# EAGLE board electretMicPreamp - THT (EAGLE 8.7.0)
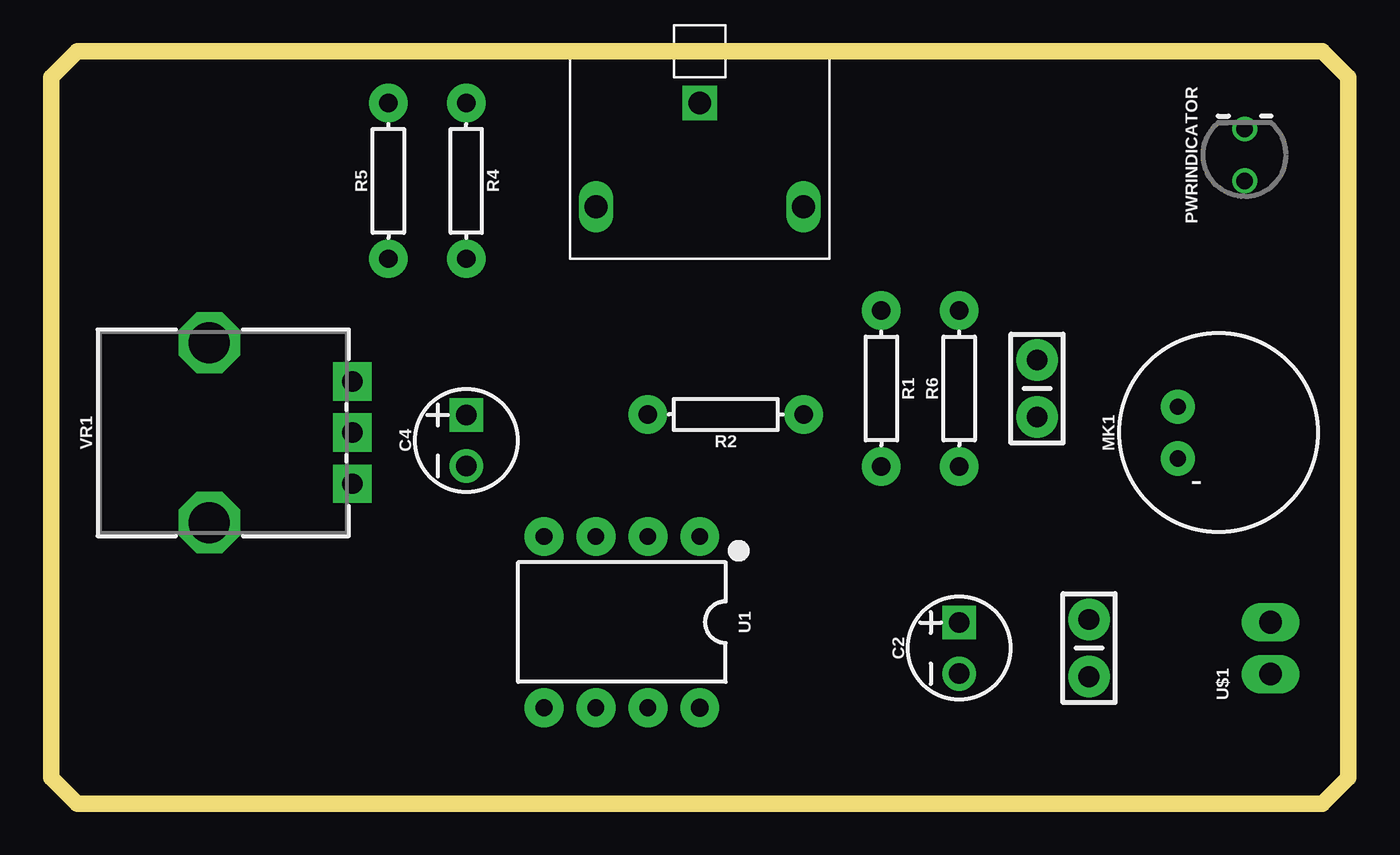
[diagram p0: board, top side]
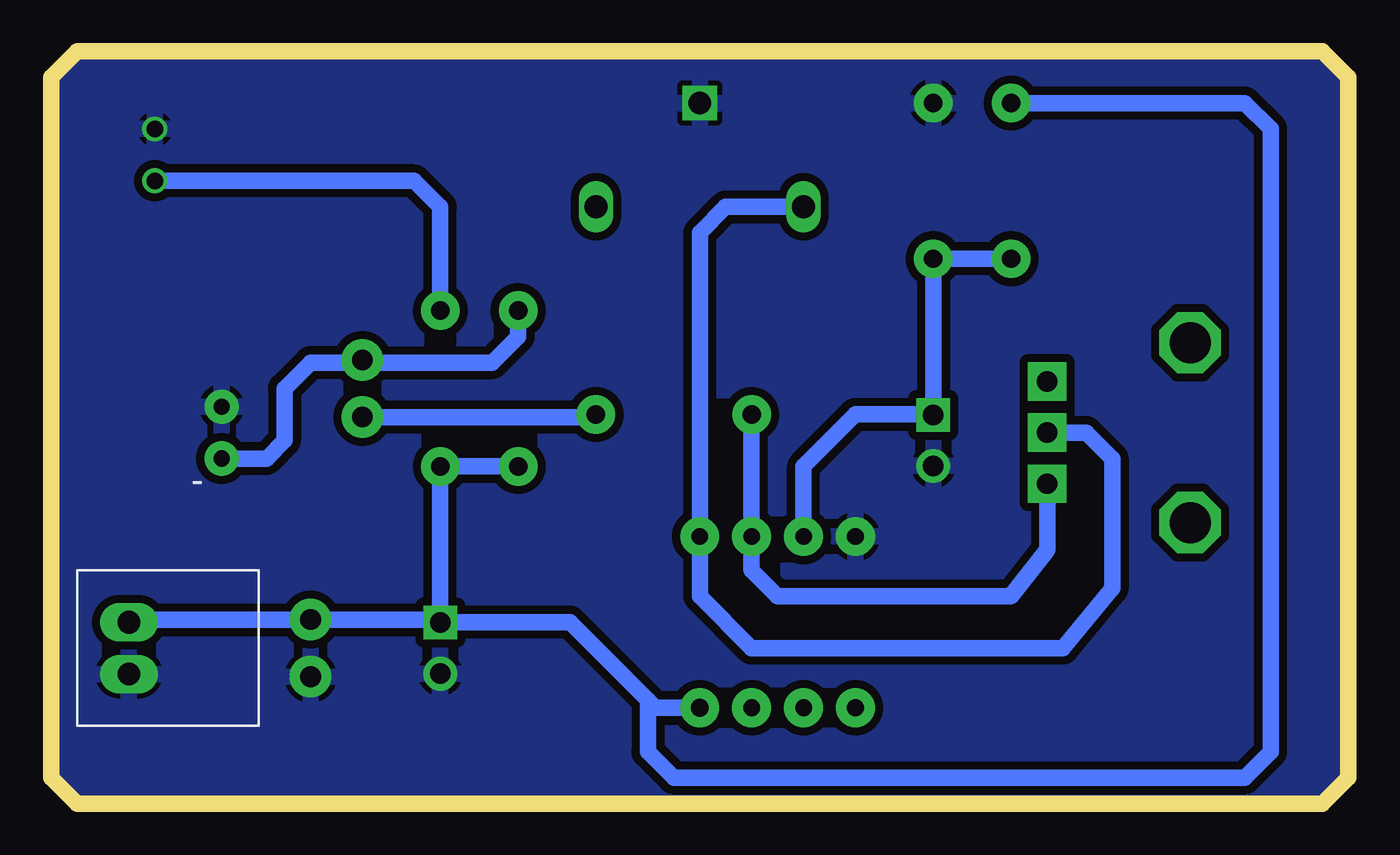
[diagram p1: board, bottom side, seen from below]

Size 63.5 x 36.83 mm. Coordinates in mm from the lower left corner, seen from the top.
Outline: 0,35.56 0,1.27 1.27,0 62.23,0 63.5,1.27 63.5,35.56 62.23,36.83 1.27,36.83 0,35.56
Copper layers (1*16): Top 0.035mm / dielectric 1.5mm / Bottom 0.035mm
Design rules "OthermillDRC_1_64_v2": minimum track width 16mil, minimum drill 31mil, track to track 0.39878125mm, track to pad 0.39878125mm, pad to pad 0.39878125mm, via to via 0.39878125mm, smd to smd 0mil, copper to edge 0mil, drill to drill 1mil, minimum pad ring 0mil, minimum via ring 15mil, stop-mask expansion 1mil, vias tented up to drill 30mil, thermal gap 10mil

## Footprints (pad centres in the part's own frame; a part is rotated, then mirrored left to right if it is on the bottom)
CAP-PTH-SMALL-KIT = drill 1.016 pad 2.032: 1 -1.397,0; 2 1.397,0
CPOL-RADIAL-2.5MM-5MM = drill 1 pad 1.651 square: 1 1.25,0 | drill 1 pad 1.651: 2 -1.25,0
MICROPHONE-PTH-9.7MM = drill 0.8 pad 1.676: 1 -2,1.27; 2 -2,-1.27
LED_3MM-NS = drill 0.813: A -1.27,0; K 1.27,0
AXIAL-0.3 = drill 0.9 pad 1.88: P$1 -3.81,0; P$2 3.81,0
DIP08-KIT = drill 0.813 pad 1.905: 1 -3.81,-4.191; 2 -1.27,-4.191; 3 1.27,-4.191; 4 3.81,-4.191; 5 3.81,4.191; 6 1.27,4.191; 7 -1.27,4.191 | drill 0.864 pad 1.905: 8 -3.81,4.191
SCREWTERMINAL-2X1 = drill 1.118 pad 1.88 long: 1 -1.27,0; 2 1.27,0
HORIZONTAL_STEREO_JACK = drill 1.118 square: P$1 3.81,5.08 | drill 1.118 long: P$2 -1.27,10.16; P$3 -1.27,0
POT-PTH-ALPS = drill 1 pad 1.88 square: P$1 7,-2.5; P$2 7,0; P$3 7,2.5 | drill 2 octagon: P$4 0,-4.4; P$5 0,4.4

## Placement (x,y rotation side)
C1  0.1uF  [CAP-PTH-SMALL-KIT]  48.26,20.32 270 top
C2  470uF  [CPOL-RADIAL-2.5MM-5MM]  44.45,7.62 90 top
C3  0.1uF  [CAP-PTH-SMALL-KIT]  50.8,7.62 270 top
C4  10uF  [CPOL-RADIAL-2.5MM-5MM]  20.32,17.78 90 top
MK1  Electret  [MICROPHONE-PTH-9.7MM]  57.15,18.16 0 top
PWRINDICATOR  [LED_3MM-NS]  58.42,31.75 90 top
R1  10k  [AXIAL-0.3]  40.64,20.32 270 top
R2  1k  [AXIAL-0.3]  33.02,19.05 180 top
R4  100k  [AXIAL-0.3]  20.32,30.48 270 top
R5  100k  [AXIAL-0.3]  16.51,30.48 90 top
R6  10k  [AXIAL-0.3]  44.45,20.32 90 top
U1  LM358  [DIP08-KIT]  27.94,8.89 180 top
U$1  5v  [SCREWTERMINAL-2X1]  59.69,7.62 90 top
U$2  HORIZONTAL_STEREO_JACK  [HORIZONTAL_STEREO_JACK]  36.83,30.48 90 top
VR1  200k  [POT-PTH-ALPS]  7.75,18.16 0 top

## Library data of the parts
C1 C3 = SparkFun-Capacitors; PROD_ID: CAP-08370
C2 C4 = SparkFun-Capacitors; PROD_ID: CAP-08440
MK1 = SparkFun-Retired; PROD_ID: COMP-08856; SF_ID: COM-08635
PWRINDICATOR = SparkFun-LED
R1 R2 R4-R6 = SparkFun-Resistors; PROD_ID: RES-08380
U1 = SparkFun-IC-Amplifiers; PROD_ID: IC-09172
U$1 = SparkFun-Connectors
U$2 = thonkiconn
VR1 = SparkFun-Resistors; PROD_ID: RES-09177; SF_SKU: COM-09288

## Nets
GND: C2.2 C3.2 C4.2 MK1.1 PWRINDICATOR.K R4.P$1 U1.4 U$1.1 U$2.P$1
N$1: C1.1 MK1.2 R1.P$1
N$2: C1.2 R2.P$1
N$3: R2.P$2 U1.2 VR1.P$1
N$5: U1.1 U$2.P$2 VR1.P$2
N$6: PWRINDICATOR.A R6.P$2
N$7: C4.1 R4.P$2 R5.P$1 U1.3
VCC: C2.1 C3.1 R1.P$2 R5.P$2 R6.P$1 U1.8 U$1.2

## Tracks (layer width: path | path; a pad name or v marks a point on that pad's centre or on a via)
GND
  pour Bottom: 0,35.56 0,1.27 1.27,0 62.23,0 63.5,1.27 63.5,35.56 62.23,36.83 1.27,36.83
N$1
  Bottom 0.813: R1.P$1 40.64,22.86 41.91,21.59 48.13,21.59 C1.1 48.39,21.59 50.8,21.59 52.07,20.32 52.07,17.78 52.96,16.89 MK1.2
N$2
  Bottom 0.813: R2.P$1 36.96,18.92 C1.2
N$3
  Bottom 0.813: VR1.P$1 14.75,12.43 16.51,10.16 27.94,10.16 29.21,11.43 U1.2 R2.P$2
N$5
  Bottom 0.813: VR1.P$2 12.83,18.16 11.56,16.89 11.56,10.54 13.97,7.62 29.21,7.62 31.75,10.16 U1.1 31.75,27.94 30.48,29.21 U$2.P$2
N$6
  Bottom 0.813: R6.P$2 44.45,29.21 45.72,30.48 PWRINDICATOR.A
N$7
  Bottom 0.813: R5.P$1 R4.P$2 C4.1 20.34,19.05 24.13,19.05 26.67,16.51 U1.3
VCC
  Bottom 0.813: U1.8 33.91,4.7 34.29,5.08 | 34.29,5.08 38.1,8.89 44.43,8.89 C2.1 | C2.1 R6.P$1 R1.P$2 | U$1.2 59.56,9.02 C3.1 44.6,9.02 C2.1 | 34.29,5.08 34.29,2.54 33.02,1.27 5.08,1.27 3.81,2.54 3.81,33.02 5.08,34.29 R5.P$2